# Altium PCB Receiver.PcbDoc
Units mm, origin at the board's own origin, x right, y up, seen from the top; angles counter-clockwise.
Board outline 24 x 8.64 mm, 2 copper layers (Top Layer, Bottom Layer); 11 components, 6 nets, 27 pads, 2 vias.
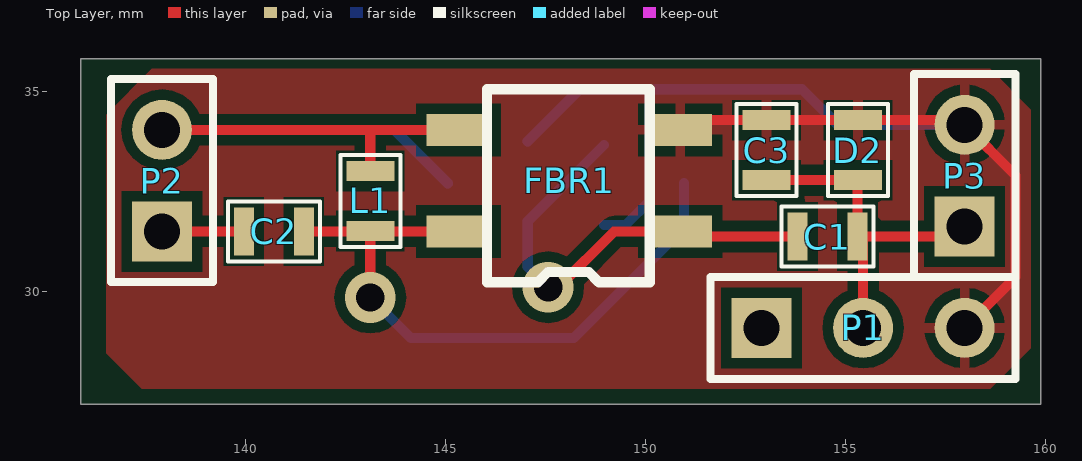
[diagram p0: Top Layer view]
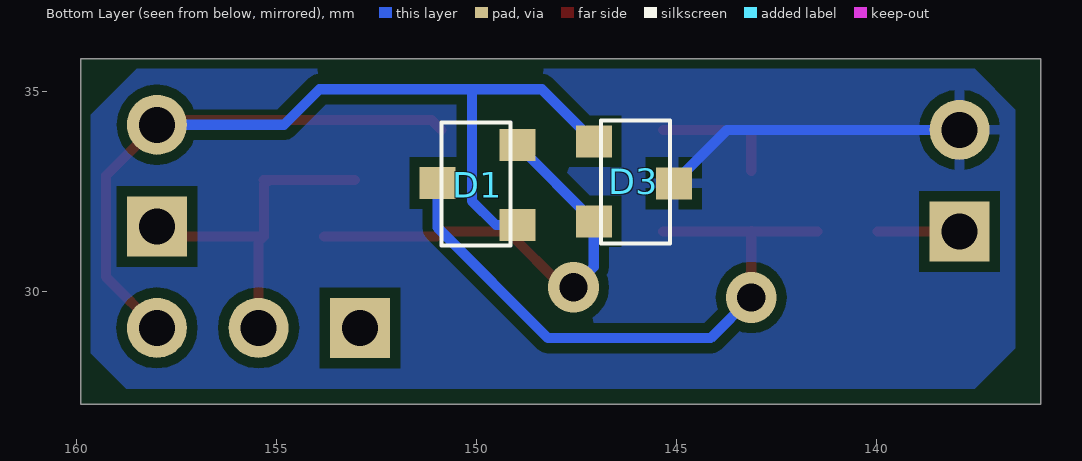
[diagram p1: Bottom Layer view, seen from below]

## Layer stack, top to bottom
Top Solder: solder mask 0.0102, Solder Resist, Dk 3.5
Top Layer: signal copper 0.0356
Dielectric 1: dielectric 0.32, FR-4, Dk 4.8
Bottom Layer: signal copper 0.0356
Bottom Solder: solder mask 0.0102, Solder Resist, Dk 3.5

## Board outline
135.89,27.178 159.893,27.178 159.893,35.814 135.89,35.814

## Design rules (kind name [scope] priority, off if disabled: settings)
Clearance [All] p1: gap=0.254
PolygonConnect [All] p1: connectstyle=Relief reliefconductorwidth=0.254 reliefentries=4 polygonreliefangle="90 Angle" airgapwidth=0.254
RoutingVias [All] p1: holewidth=0.711 width=1.27 viastyle="Through Hole" minholewidth=0.711 minwidth=1.27 maxholewidth=0.711 maxwidth=1.27
SolderMaskExpansion [All] p1: expansion=0.102
UnpouredPolygon [All] p1: allowunpoured=FALSE
Width [All] p1: maxlimit=0.254 minlimit=0.254 preferedwidth=0.254
29 further rules are at their usual default settings.

## Components (designator, comment, footprint, x,y, rotation, side; value= is the part's Value field where it differs from the comment)
C1 "Cap" 0805 154.559,31.369 r0 top
C2 "Cap" 0805 140.716,31.496 r0 top
C3 "Cap" 0805 153.035,33.528 r270 top
D1 "SDM40E20L" SOT23 148.971,33.655 r0 bottom
D2 "LED0" 0805 155.321,33.528 r270 top
D3 "SDM40E20L" SOT23 147.066,31.75 r180 bottom
FBR1 "FBR" HD_DIP 150.876,31.496 r180 top
L1 "Inductor" 0805 143.129,32.258 r270 top
P1 "Pot" HDR1X3 152.908,29.083 r0 top
P2 "In" HDR1X2 137.922,31.496 r90 top
P3 "Out" HDR1X2 157.988,31.623 r90 top

## Footprints (in the part's own frame and the unit in brackets; to place one, negate y for a bottom-side part, rotate by r counter-clockwise, add the part's x,y. Pads: shape width x height; smd on the part's side, far side on the other; paste and mask are expansions set on the pad)
0805 [mm]
  rect 0.5x1.2 smd: 1(-0.75,0) 2(0.75,0)
  silkscreen extent -1.15,-0.75 1.15,0.75
HD_DIP [mm] "2x2"
  rect 1.6x0.8 smd: 1(0,0) 2(0,-2.54) 3(5.54,-2.54) 4(5.54,0)
  silkscreen extent 0.76,-3.56 4.83,1.27
HDR1X2 [mm] "Connector; Header; 2 Position"
  rect 1.5x1.5 hole 0.9: 1(0,0)
  round 1.5 hole 0.9: 2(2.54,0)
  silkscreen extent -1.27,-1.27 3.81,1.27
HDR1X3 [mm] "Connector; Header; 3 Position"
  rect 1.5x1.5 hole 0.9: 1(0,0)
  round 1.5 hole 0.9: 2(2.54,0) 3(5.08,0)
  silkscreen extent -1.27,-1.27 6.35,1.27
SOT23 [mm]
  rect 0.9x0.8 smd: 1(0,2) 2(0,0) 3(2,0.95)
  silkscreen extent 0.18,-0.56 1.91,2.51

## Part data
C1 C2 C3: "Capacitor"
D1 D3: library part BAS70-04
D2: "Typical INFRARED GaAs LED"
FBR1: library part FBR_CBRHDSH1-40L
P1: library part "Header 3", "Header, 3-Pin"
P2 P3: library part "Header 2", "Header, 2-Pin"

## Via types
v1: diameter 1.27, hole 0.711, Top Layer to Bottom Layer, 2 vias

## Nets (pads, with @x,y where several pads share a name; then routed paths per layer and width w, separated by ;. In a path a pad name is that pad's centre, name@x,y a point inside that pad or via, vN(x,y) a via of type N, cw(c..) or ccw(c..) an arc to the next point about the centre after c; other vN are vias at no path point)
IN+: C2.1 P2.1 | length 2
  Top Layer w0.254: P2.1 C2.1
IN-: D3.3 FBR1.3 L1.1 P2.2 | length 16.1
  Top Layer w0.254: P2.2 143.129,34.036 ; L1.1 143.129,34.036 ; FBR1.3 143.129,34.036
  Bottom Layer w0.254: P2.2 143.73,34.036 D3.3
NetC1_1: C1.1 D1.2 D3.2 FBR1.1 | length 11.4
  Top Layer w0.254: v1(147.574,30.099) 147.828,30.099 149.225,31.496 FBR1.1 151.003,31.369 C1.1
  Bottom Layer w0.254: v1(147.574,30.099) 147.066,30.607 D3.2 D1.2
NetC2_2: C2.2 D1.3 FBR1.4 L1.2 | length 16
  Top Layer w0.254: C2.2@141.478,31.496 L1.2@143.129,31.496 ; v1(143.129,29.845) L1.2@143.129,31.496 ; L1.2 L1.2@143.129,31.496 ; FBR1.4 L1.2@143.129,31.496
  Bottom Layer w0.254: v1(143.129,29.845) 144.145,28.829 148.209,28.829 150.971,31.591 D1.3
OUT+: C1.2 C3.2 D2.2 P1.2 P3.1 | length 8.9
  Top Layer w0.254: C3.2 D2.2@155.194,32.778 ; D2.2 D2.2@155.194,32.778 ; P1.2 155.448,31.23 C1.2 ; P3.1 157.734,31.369 C1.2 ; D2.2@155.194,32.778 155.309,32.663 C1.2
OUT-: C3.1 D1.1 D2.1 D3.1 FBR1.2 P1.3 P3.2 | length 30
  Top Layer w0.254: FBR1.2 151.118,34.278 D2.1@155.702,34.278 ; D2.1@155.194,34.278 157.873,34.278 P3.2 159.258,32.893 159.258,30.353 P1.3
  Bottom Layer w0.254: D3.1 148.368,35.052 150.114,35.052 ; D1.1 149.511,31.655 150.114,32.258 150.114,35.052 ; 152.781,35.052 153.924,35.052 154.813,34.163 P3.2 ; 152.908,35.052 150.114,35.052
pads on no net: P1.1

## Polygon pours and split planes (outlines as drawn)
OUT- on Top Layer "Top_GND" (solid, remove dead copper, pour order 4): 137.668,35.56 158.623,35.56 159.639,34.544 159.639,28.575 158.623,27.559 137.414,27.559 136.525,28.448 136.525,34.417
IN- on Bottom Layer "Bot_GND" (solid, remove dead copper, pour order 3): 158.496,35.56 137.541,35.56 136.525,34.544 136.525,28.575 137.541,27.559 158.75,27.559 159.639,28.448 159.639,34.417

## Silkscreen, mask and mechanical layers (free items; w line width, h text height)
Mechanical 1:
  lines w0.254: 136.271,27.305 159.893,27.305 159.893,35.814 136.271,35.814 136.271,27.305

## Dimensions
159.893,27.178 to 159.893,35.814 on Top Overlay
159.893,27.178 to 135.89,27.178 on Top Overlay